# Altium PCB m11tcp.PcbDoc
Units mil, origin at the board's own origin, x right, y up, seen from the top; angles counter-clockwise.
Board outline 2000 x 2600 mil, 2 copper layers (Top Layer, Bottom Layer); 26 components, 56 nets, 128 pads, 16 vias.
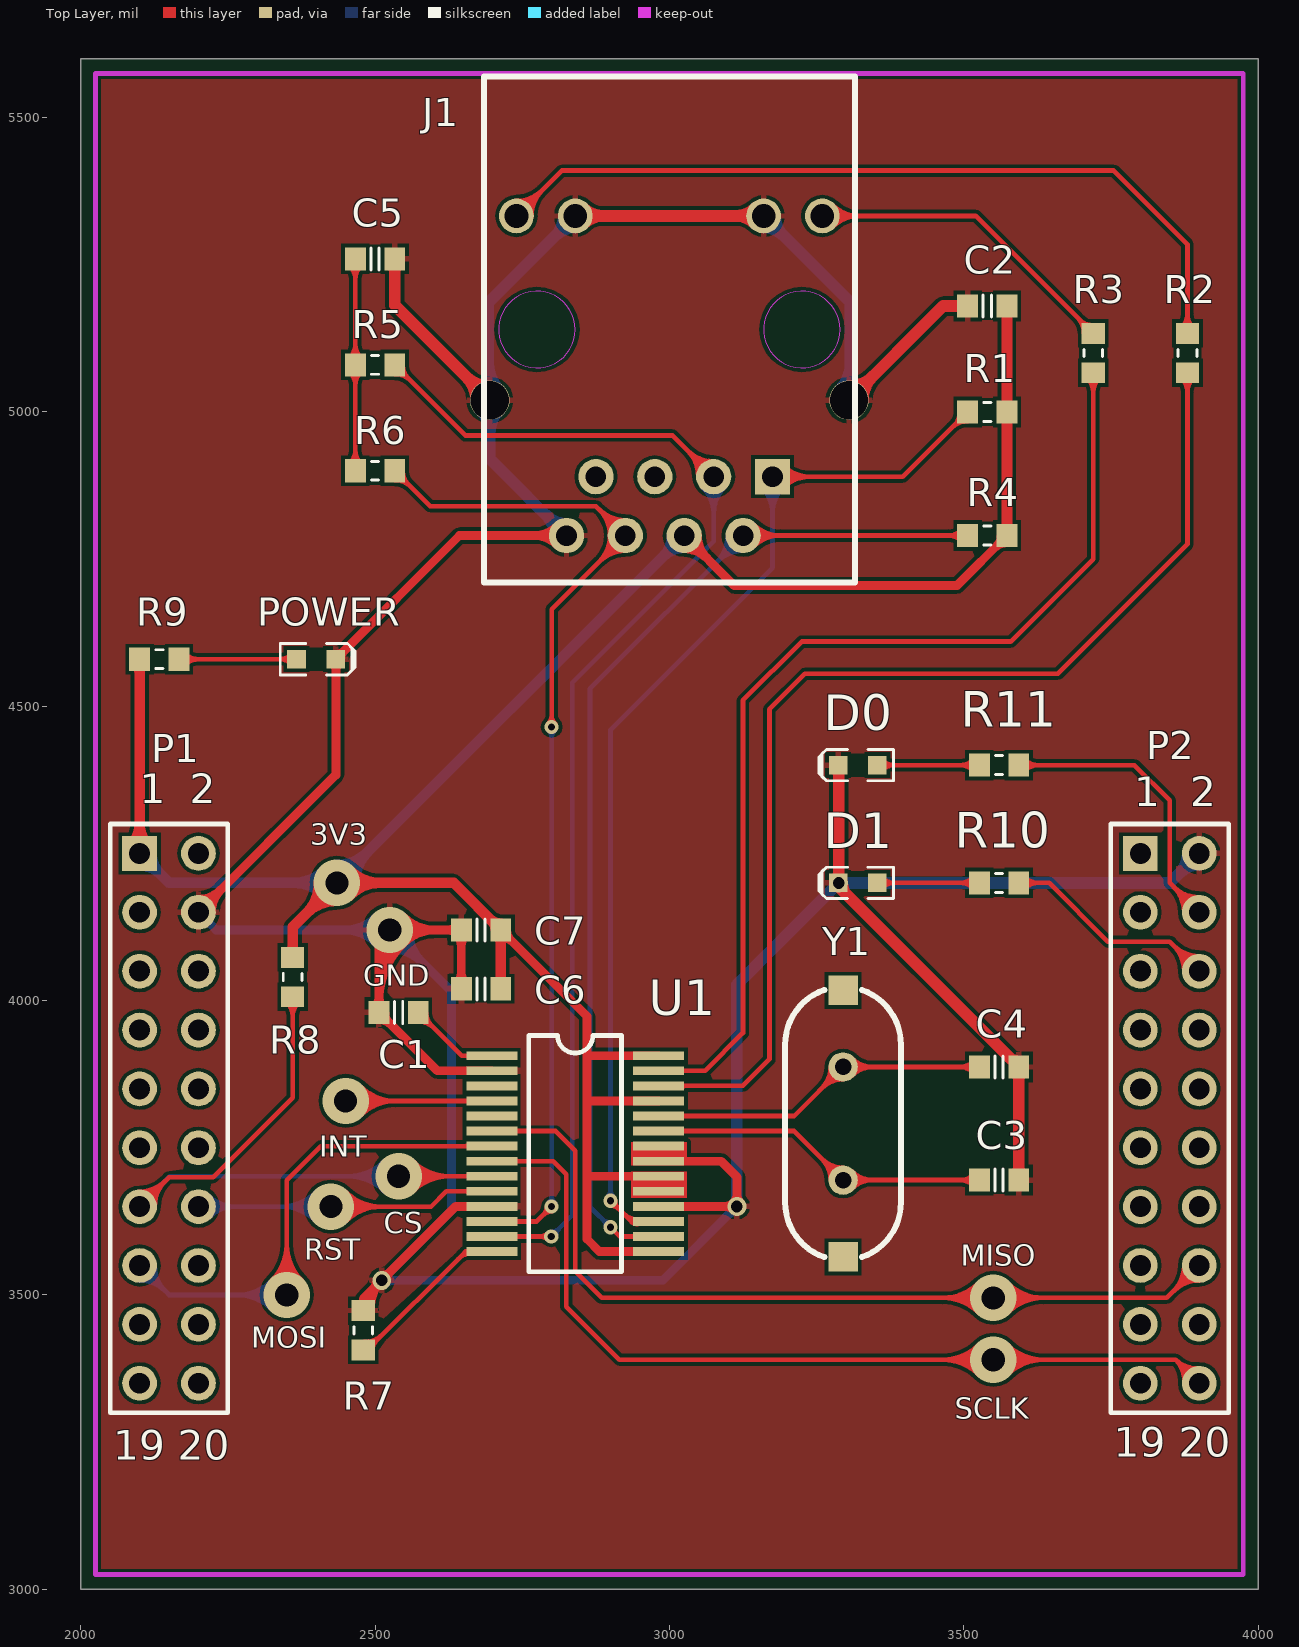
[diagram p0: Top Layer view]
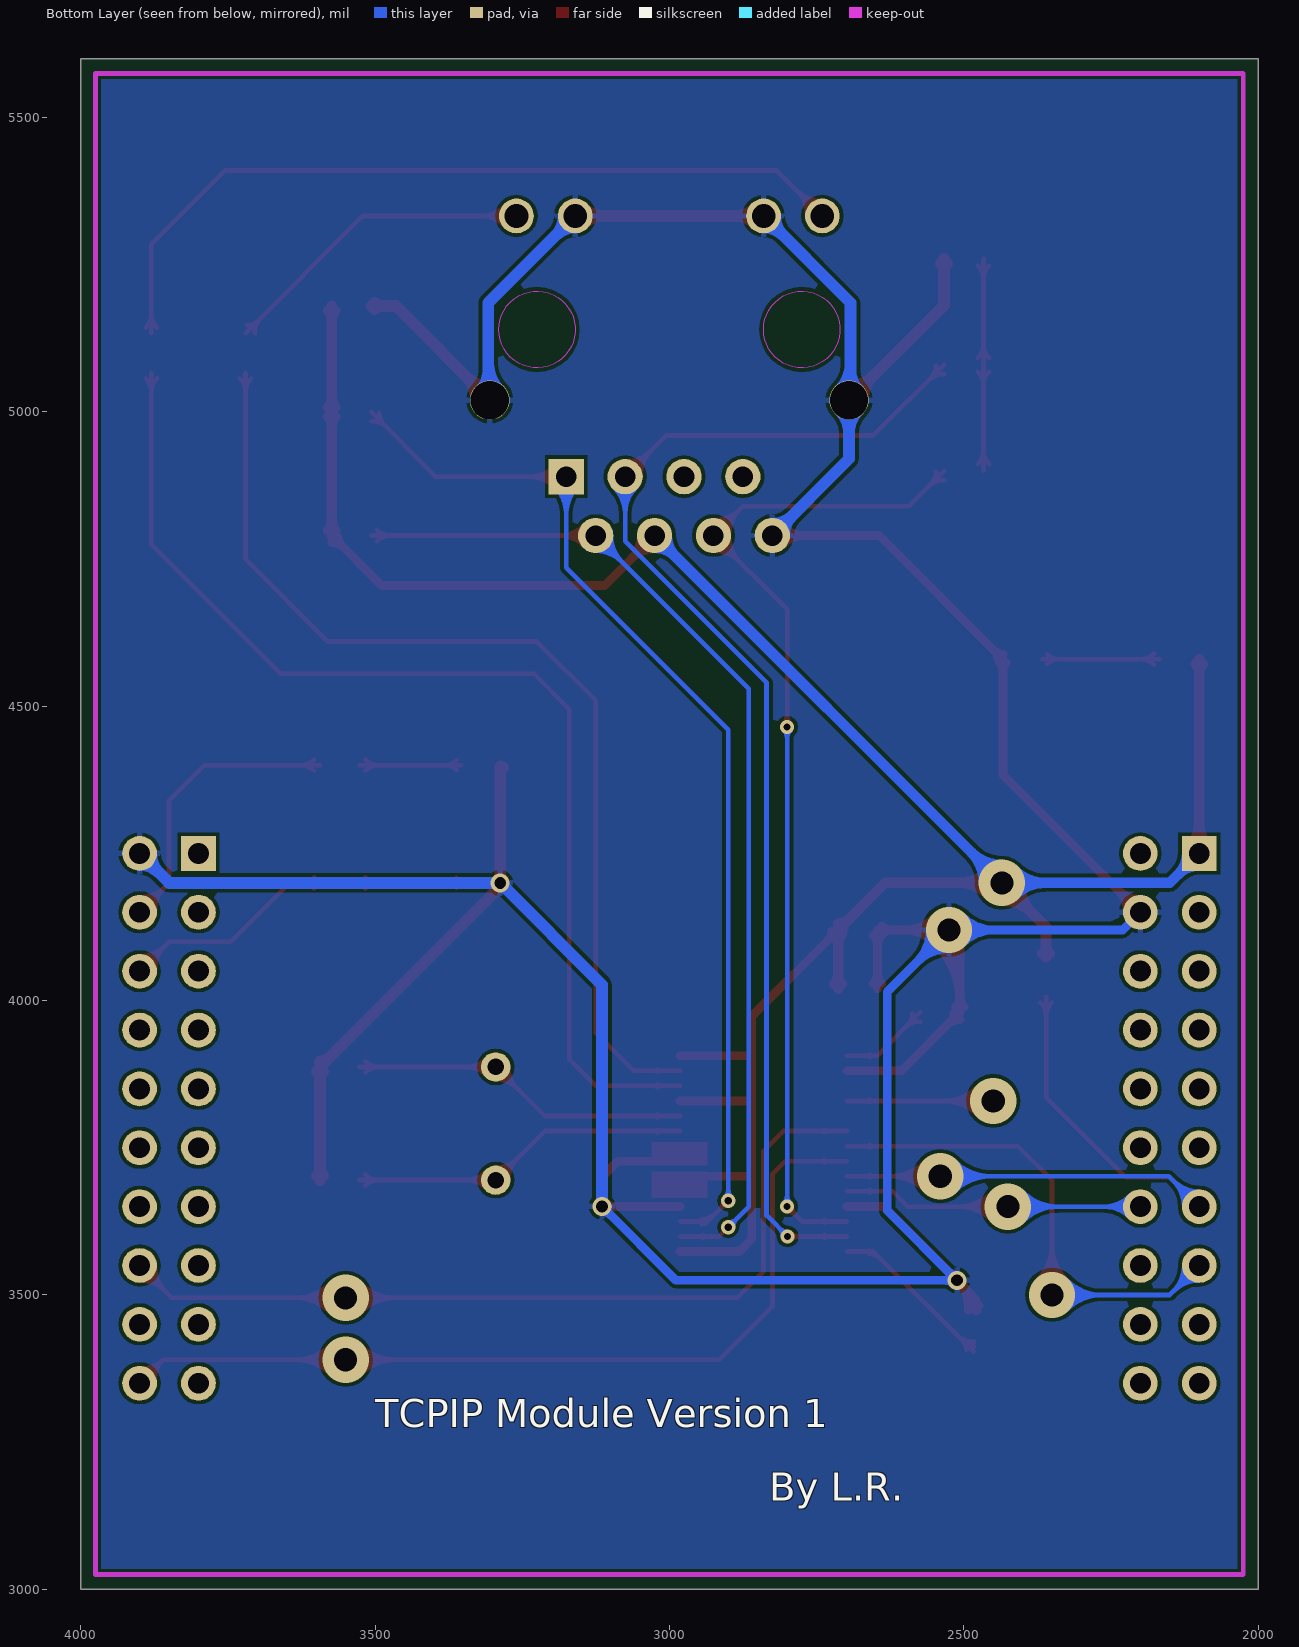
[diagram p1: Bottom Layer view, seen from below]
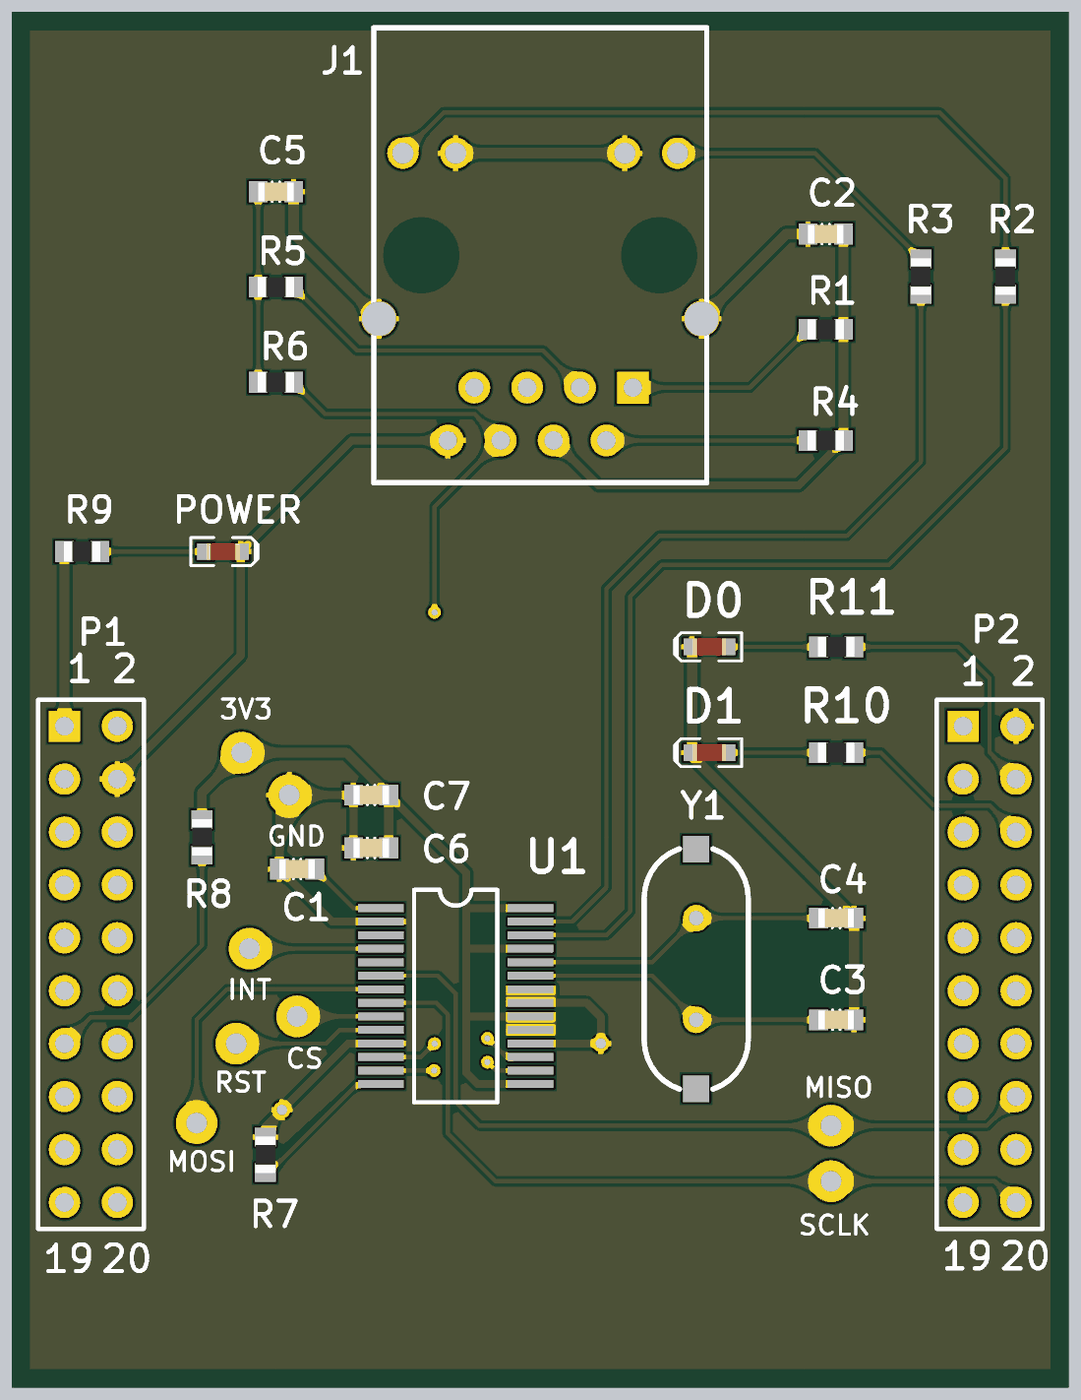
[diagram p2: 3D render of the assembled board from above, using the file's embedded part models]

## Layer stack, top to bottom
Top Layer: signal copper 1.4
Dielectric: dielectric 12.6, FR-4, Dk 4.8
Bottom Layer: signal copper 1.4

## Board outline
2000,3000 4000,3000 4000,5600 2000,5600

## Design rules (kind name [scope] priority, off if disabled: settings)
Clearance [All] p1: gap=6
PolygonConnect [All] p1: connectstyle=Relief reliefconductorwidth=10 reliefentries=4 polygonreliefangle="90 Angle"
RoutingVias VSS [InNet('GND')] p1: holewidth=20 width=32 viastyle="Through Hole" minholewidth=20 minwidth=32 maxholewidth=40 maxwidth=80
RoutingVias 3V3 [InNet('VCC3.3')] p2: holewidth=18 width=30 viastyle="Through Hole" minholewidth=18 minwidth=30 maxholewidth=40 maxwidth=80
RoutingVias RoutingVias_1 [All] p3: holewidth=12 width=24 viastyle="Through Hole" minholewidth=12 minwidth=24 maxholewidth=40 maxwidth=80
SilkscreenOverComponentPads [All] p1: minsilkscreentomaskgap=10
SolderMaskExpansion [All] p1: expansion=4
Width GND [InNet('GND')] p1: maxlimit=20 minlimit=8 preferedwidth=20
Width VCC [InNet('VCC3.3')] p2: maxlimit=18 minlimit=8 preferedwidth=18
Width Width_1 [All] p3: maxlimit=8 minlimit=8 preferedwidth=8
27 further rules are at their usual default settings.

## Components (designator, comment, footprint, x,y, rotation, side; value= is the part's Value field where it differs from the comment)
C1 "Cap Semi" CAP_0603 2540,3980 r0 top
C2 "Cap Semi" CAP_0603 3540,5180 r0 top
C3 "Cap Semi" CAP_0603 3560,3695.12 r180 top
C4 "Cap Semi" CAP_0603 3560,3887.24 r180 top
C5 "Cap Semi" CAP_0603 2500,5260 r180 top
C6 "Cap Semi" CAP_0603 2680,4020 r0 top
C7 "Cap Semi" CAP_0603 2680,4120 r0 top
D0 "LED2" LED_0603_RED 3320,4400 r180 top
D1 "LED2" LED_0603_RED 3320,4200 r180 top
J1 "RJ45" HR911105A 3000,5140 r0 top
P1 "Header 10X2" HDR2X10 2100,4250 r270 top
P2 "Header 10X2" HDR2X10 3800,4250 r270 top
POWER "LED2" LED_0603_RED 2400,4580 r0 top
R1 "Res Semi" RES_0603 3540,5000 r180 top
R2 "Res Semi" RES_0603 3880,5100 r270 top
R3 "Res Semi" RES_0603 3720,5100 r270 top
R4 "Res Semi" RES_0603 3540,4790 r180 top
R5 "Res Semi" RES_0603 2500,5080 r0 top
R6 "Res Semi" RES_0603 2500,4900 r0 top
R7 "Res Semi" RES_0603 2480,3440 r270 top
R8 "Res Semi" RES_0603 2360,4040 r90 top
R9 "Res Semi" RES_0603 2133.47,4580 r0 top
R10 "Res Semi" RES_0603 3560,4200 r180 top
R11 "Res Semi" RES_0603 3560,4400 r180 top
U1 "ENC28J60" SSOP28 2840,3740 r0 top
Y1 "25MHz" XTAL_US 3295,3695.12 r90 top

## Footprints (in the part's own frame and the unit in brackets; to place one, negate y for a bottom-side part, rotate by r counter-clockwise, add the part's x,y. Pads: shape width x height; smd on the part's side, far side on the other; paste and mask are expansions set on the pad)
CAP_0603 [mm]
  rect 0.9x1 smd: 1(-0.85,0) 2(0.85,0)
  Top Layer pour cut-out: -0.4,0.6 0.4,0.6 0.4,-0.6 -0.4,-0.6
  silkscreen extent -0.18,-0.48 0.18,0.48, body extent -0.85,-0.45 0.85,0.45, height 0.89
HDR2X10 [mm] "Connector; Header; 10x2 Position"
  rect 1.5x1.5 hole 0.9: 1(0,0)
  round 1.5 hole 0.9: 2(0,2.54) 3(2.54,0) 4(2.54,2.54) 5(5.08,0) 6(5.08,2.54) 7(7.62,0) 8(7.62,2.54) 9(10.16,0) 10(10.16,2.54) 11(12.7,0) 12(12.7,2.54) 13(15.24,0) 14(15.24,2.54) 15(17.78,0) 16(17.78,2.54) 17(20.32,0) 18(20.32,2.54) 19(22.86,0) 20(22.86,2.54)
  silkscreen extent -1.27,-1.27 24.13,3.81
HR911105A [mm]
  rect 1.524x1.524 hole 0.889: 1(4.45,-6.35)
  round 1.524 hole 0.889: 2(3.18,-8.89) 3(1.91,-6.35) 4(0.64,-8.89) 5(-0.63,-6.35) 6(-1.9,-8.89) 7(-3.17,-6.35) 8(-4.44,-8.89)
  round 1.5 hole 1.02: 9(6.6,4.9) 10(4.064,4.9) 11(-4.064,4.9) 12(-6.6,4.9)
  round 1.7 hole 1.65: 13(7.75,-3.048) 14(-7.75,-3.048)
  Keep-Out Layer circle w0.051: c-5.714,0 r1.65
  Keep-Out Layer circle w0.051: c5.716,0 r1.65
  silkscreen extent -8,-10.92 8,10.92
LED_0603_RED [mm]
  rect 0.8x0.8 smd: 1(-0.85,0) 2(0.85,0)
  Top Layer pour cut-out: -0.5,0.5 0.5,0.5 0.5,-0.5 -0.5,-0.5
  silkscreen extent -1.55,-0.68 1.68,0.67, body extent -0.8,-0.4 0.8,0.4, height 0.75
RES_0603 [mm]
  rect 0.9x1 smd: 1(-0.85,0) 2(0.85,0)
  Top Layer pour cut-out: -0.4,0.6 0.4,0.6 0.4,-0.6 -0.4,-0.6
  silkscreen extent -0.15,-0.41 0.15,0.41, body extent -0.87,-0.47 0.88,0.48, height 0.54
SSOP28 [mm]
  rect 2.2x0.38 smd: 1(-3.6,4.225) 2(-3.6,3.575) 3(-3.6,2.925) 4(-3.6,2.275) 5(-3.6,1.625) 6(-3.6,0.975) 7(-3.6,0.325) 8(-3.6,-0.325) 9(-3.6,-0.975) 10(-3.6,-1.625) 11(-3.6,-2.275) 12(-3.6,-2.925) 13(-3.6,-3.575) 14(-3.6,-4.225) 15(3.6,-4.225) 16(3.6,-3.575) 17(3.6,-2.925) 18(3.6,-2.275) 19(3.6,-1.625) 20(3.6,-0.975) 21(3.6,-0.325) 22(3.6,0.325) 23(3.6,0.975) 24(3.6,1.625) 25(3.6,2.275) 26(3.6,2.925) 27(3.6,3.575) 28(3.6,4.225)
  silkscreen extent -2,-5.1 2,5.1
XTAL_US [mil]
  round 50 hole 28: 1(0,0) 2(192.13,0)
  rect 50x50 smd: ""(-130.32,0) ""(322.44,0)
  silkscreen extent -131,-98 323,98

## Part data
C1 C2 C3 C4 C5 C6 C7: "Capacitor (Semiconductor SIM Model)"
D0 D1 POWER: "Typical RED, GREEN, YELLOW, AMBER GaAs LED"
J1: library part HR911105
P1 P2: "Header, 10-Pin, Dual row"
R1 R2 R3 R4 R5 R6 R7 R8 R9 R10 R11: "Semiconductor Resistor"
Y1: library part XTAL, "Crystal Oscillator"

## Via types
v1: diameter 78.74, hole 39.37, Top Layer to Bottom Layer, 8 vias
v2: diameter 24, hole 12, Top Layer to Bottom Layer, 5 vias
v3: diameter 32, hole 20, Top Layer to Bottom Layer, 3 vias

## Nets (pads, with @x,y where several pads share a name; then routed paths per layer and width w, separated by ;. In a path a pad name is that pad's centre, name@x,y a point inside that pad or via, vN(x,y) a via of type N, cw(c..) or ccw(c..) an arc to the next point about the centre after c; other vN are vias at no path point)
GND: C1.1 C2.1 C3.1 C4.1 C5.1 C6.1 C7.1 D0.2 D1.2 J1.8 J1.10 J1.11 J1.13 J1.14 P1.4 P2.2 POWER.2 R7.1 U1.2 U1.11 U1.18 U1.21 U1.22 | length 10568.1
  Top Layer w15: P1.4 2433.46,4383.46 POWER.2 2643.47,4790 J1.8 ; P1.4@2200,4172.03 ccw(c2200,4225.21) 2237.6,4187.6 ccw(c2275.21,4150) P1.4@2222.03,4150 ; POWER.2@2427.63,4574.17 cw(c2413.55,4560.09) 2433.46,4560.09 cw(c2453.38,4560.09) POWER.2@2439.3,4574.17 ; POWER.2@2433.46,4588.25 ccw(c2433.46,4608.16) 2447.54,4594.08 ccw(c2461.63,4580) POWER.2@2441.71,4580 ; R7.1@2474.01,3481.74 ccw(c2465.53,3493.46) 2480,3493.46 ; R7.1@2477.2,3473.17 cw(c2513.67,3475.45) 2487.83,3501.29 ; R7.1 2480,3493.47 ; R7.1@2485.99,3481.74 cw(c2494.47,3493.46) 2480,3493.46 ; R7.1@2492.17,3474.1 cw(c2557.9,3478.22) v3(2511.33,3524.8) ; C1.1@2499.31,3989.19 ccw(c2481.87,4006.63) 2506.53,4006.63 ccw(c2531.2,4006.63) C1.1@2513.76,3989.19 ; v3@2502.83,3524.8 cw(c2482.31,3524.8) 2496.82,3510.29 cw(c2511.33,3495.77) v3@2511.33,3516.3 ; C1.1@2506.53,3967.82 cw(c2506.53,3938.4) 2527.34,3959.2 ; C1.1@2506.53,3998.48 cw(c2646.52,3998.48) 2547.54,4097.46 cw(c2601.94,4043.06) 2601.94,4120 cw(c2601.94,4196.94) v1@2547.54,4142.54 ; 2506.53,4034.69 cw(c2610.31,4034.69) 2536.93,4108.07 cw(c2565.73,4079.27) 2565.73,4120 cw(c2565.73,4160.73) v1@2536.93,4131.93 ; 2506.53,4070.91 cw(c2574.09,4070.91) v1@2526.32,4118.68 ; v1@2506.53,4101.53 C1.1 2605.79,3880.75 U1.2 ; v3@2511.33,3533.3 ccw(c2511.33,3553.82) 2525.84,3539.31 ccw(c2540.35,3524.8) v3@2519.83,3524.8 ; C1.1@2516.75,3978.03 ccw(c2536.66,3978.03) C1.1@2522.58,3963.95 ; v1(2525,4120) C7.1 C6.1 ; C6.1@2639.31,4029.19 ccw(c2621.87,4046.63) 2646.53,4046.63 ccw(c2671.2,4046.63) C6.1@2653.76,4029.19 ; C7.1@2639.31,4110.81 cw(c2621.87,4093.37) 2646.53,4093.37 cw(c2671.2,4093.37) C7.1@2653.76,4110.81 ; C7.1@2639.31,4112.78 ccw(c2621.87,4095.34) 2621.87,4120 ccw(c2621.87,4144.67) C7.1@2639.31,4127.22 ; U1.11 2636.97,3650.43 v3(2511.33,3524.8) ; J1.8@2809.29,4774.09 ccw(c2770.88,4735.68) 2770.88,4790 ccw(c2770.88,4844.32) J1.8@2809.29,4805.91 ; U1.18 v3(3114.57,3650.43) ; U1.21 3087.8,3727.2 3115,3700 v3@3115,3650.43 ; v3@3108.56,3644.42 ccw(c3094.05,3629.91) 3094.05,3650.43 ccw(c3094.05,3670.95) 3108.56,3656.44 ccw(c3093,3672) 3115,3672 ; 3115,3669.91 ccw(c3134.04,3669.91) v3@3120.58,3656.44 ; 2480,3493.47 v3(2511.33,3524.8)
  Top Layer w20: C5.1@2528.01,5252.57 cw(c2514.84,5239.4) 2533.47,5239.4 cw(c2552.09,5239.4) C5.1@2538.92,5252.57 ; C5.1 2533.47,5181.42 J1.14 ; J1.14@2671.42,5020 ccw(c2614.77,5020) 2654.83,5060.06 ccw(c2694.88,5100.11) J1.14@2694.88,5043.46 ; J1.11 J1.10 ; J1.11@2853.81,5319.1 cw(c2887.14,5285.77) 2887.14,5332.91 cw(c2887.14,5380.06) J1.11@2853.81,5346.72 ; J1.10@3146.19,5319.1 ccw(c3112.86,5285.77) 3112.86,5332.91 ccw(c3112.86,5380.06) J1.10@3146.19,5346.72 ; D1.2@3282.47,4204.07 ccw(c3270.24,4216.29) 3287.53,4216.29 ; D0.2@3282.47,4395.94 cw(c3270.24,4383.71) 3287.53,4383.71 ; D1.2 3286.54,4194.17 C4.1 C3.1 ; v3(3287.53,4200) D0.2@3287.53,4397.53 ; D1.2@3292.28,4200 ccw(c3320.23,4200) 3300.47,4180.24 ; D1.2@3293.53,4200 ccw(c3324.5,4200) 3302.61,4178.1 ; J1.13 3465.12,5180 C2.1 ; J1.13@3305.12,5043.46 ccw(c3305.12,5100.11) 3345.17,5060.06 ccw(c3385.23,5020) J1.13@3328.58,5020 ; C2.1@3501.08,5174.54 ccw(c3487.91,5161.37) 3487.91,5180 ccw(c3487.91,5198.63) C2.1@3501.08,5185.46 ; C4.1@3576.93,3903.78 ccw(c3593.47,3920.31) C4.1@3593.47,3896.93 ; C3.1@3588.01,3702.54 ccw(c3574.84,3715.72) 3593.47,3715.72 ccw(c3612.09,3715.72) C3.1@3598.92,3702.54 ; C4.1@3588.01,3879.82 cw(c3574.84,3866.65) 3593.47,3866.65 cw(c3612.09,3866.65) C4.1@3598.92,3879.82
  Bottom Layer w15: P1.4 2230,4120 v1(2525,4120) 2630,4015 2630,3643.47 2511.53,3525 2989.13,3525 v3(3114.57,3650.43) ; v1@2502.46,4097.46 ccw(c2448.06,4043.06) 2448.06,4120 ccw(c2448.06,4196.94) v1@2502.46,4142.54 ; v3@2511.33,3533.3 ccw(c2511.33,3553.81) 2525.84,3539.3 ccw(c2540.36,3524.8) v3@2519.83,3524.8 ; v1@2513.07,4108.07 ccw(c2484.27,4079.27) 2484.27,4120 ccw(c2484.27,4160.73) v1@2513.07,4131.93 ; v3@2517.34,3518.79 cw(c2532.35,3503.78) 2532.35,3525 ; v3@2517.34,3530.81 ccw(c2531.36,3544.82) 2531.36,3525 ; v1@2525,4088.13 cw(c2525,4011.19) 2579.41,4065.59 cw(c2633.81,4120) v1@2556.87,4120 ; v1@2525,4103.13 cw(c2525,4062.4) 2553.8,4091.2 cw(c2582.6,4120) v1@2541.87,4120 ; v3@3106.07,3650.43 cw(c3085.55,3650.43) 3100.06,3635.92 cw(c3114.57,3621.41) v3@3114.57,3641.93
  Bottom Layer w20: J1.14@2678.29,5003.41 cw(c2638.23,4963.35) 2694.88,4963.35 cw(c2751.53,4963.35) J1.14@2711.47,5003.41 ; J1.14@2678.29,5036.59 ccw(c2644.29,5070.59) 2692.37,5070.59 ; 2692.37,5082.71 ccw(c2757.59,5082.71) J1.14@2711.47,5036.59 ; J1.8@2805.2,4790 ccw(c2756.91,4790) 2791.05,4824.14 ccw(c2825.2,4858.28) J1.8@2825.2,4810 ; J1.11@2820.47,5332.91 cw(c2773.33,5332.91) 2806.66,5299.58 cw(c2840,5266.24) J1.11@2840,5313.39 ; J1.8 2694.88,4920.31 J1.14 2692.37,5022.51 2692.37,5185.28 J1.11 ; v3(3114.57,3650.43) 3114.57,4025 3114.57,4027.03 v3(3287.53,4200) 3850,4200 P2.2 ; J1.10@3160,5313.39 cw(c3160,5266.24) 3193.34,5299.58 cw(c3226.67,5332.91) J1.10@3179.53,5332.91 ; J1.10 3307.71,5185.21 3307.71,5022.59 J1.13 ; J1.13@3288.53,5036.59 ccw(c3242.22,5082.9) 3307.71,5082.9 ; 3307.71,5070.4 ccw(c3355.52,5070.4) J1.13@3321.71,5036.59 ; P2.2@3880.47,4250 cw(c3833.33,4250) 3866.66,4216.66 cw(c3900,4183.33) P2.2@3900,4230.47
LED0: P2.4 R11.1 | length 707.4
  Top Layer w8: R11.1 3790,4400 3850,4340 3850,4200 P2.4 ; R11.1@3603.16,4390.3 cw(c3626.58,4366.88) 3626.58,4400 cw(c3626.58,4433.11) R11.1@3603.16,4409.7 ; P2.4@3874.47,4150 ccw(c3812.84,4150) 3856.42,4193.58 ccw(c3900,4237.16) P2.4@3900,4175.53 ; P2.4@3882.47,4150 ccw(c3840.16,4150) 3870.08,4179.92 ccw(c3900,4209.84) P2.4@3900,4167.53
LED1: P2.6 R10.1 | length 584
  Top Layer w8: R10.1 3645,4200 3745,4100 3850,4100 P2.6 ; R10.1@3603.16,4190.3 cw(c3626.58,4166.88) 3626.58,4200 cw(c3626.58,4233.11) R10.1@3603.16,4209.7 ; P2.6@3874.47,4050 ccw(c3812.84,4050) 3856.42,4093.58 ccw(c3900,4137.16) P2.6@3900,4075.53 ; P2.6@3882.47,4050 ccw(c3840.16,4050) 3870.08,4079.92 ccw(c3900,4109.84) P2.6@3900,4067.53
LEDA: R3.2 U1.27 | length 1811
  Top Layer w8: U1.27 3060.75,3880.75 3125,3945 3125,4510 3225,4610 3580,4610 3720,4750 R3.2 ; U1.27@3020.02,3878.29 cw(c3025.96,3872.35) 3025.96,3880.75 cw(c3025.96,3889.15) U1.27@3020.02,3883.21 ; R3.2@3710.3,5056.84 cw(c3686.89,5033.42) 3720,5033.42 cw(c3753.12,5033.42) R3.2@3729.7,5056.84
LEDB: R2.2 U1.26 | length 1984.5
  Top Layer w8: U1.26 3125,3855.16 3170,3900.16 3170,4495 3230,4555 3660,4555 3880,4775 R2.2 ; U1.26@3020.02,3852.7 cw(c3025.96,3846.76) 3025.96,3855.16 cw(c3025.96,3863.56) U1.26@3020.02,3857.62 ; R2.2@3870.3,5056.84 cw(c3846.89,5033.42) 3880,5033.42 cw(c3913.12,5033.42) R2.2@3889.7,5056.84
NET_CS: P1.13 R8.1 U1.9 | length 2142.3
  Top Layer w8: P1.13 2150,3700 2225,3700 2360,3835 R8.1 ; P1.13@2100,3667.53 ccw(c2100,3709.84) 2129.92,3679.92 ccw(c2159.84,3650) P1.13@2117.53,3650 ; P1.13@2100,3675.53 ccw(c2100,3737.16) 2143.58,3693.58 ccw(c2187.16,3650) P1.13@2125.53,3650 ; R8.1@2350.3,3996.84 cw(c2326.88,3973.42) 2360,3973.42 cw(c2393.11,3973.42) R8.1@2369.7,3996.84 ; v1(2540,3701.61) U1.9 ; v1@2553.7,3687.92 cw(c2586.76,3654.85) 2586.76,3701.61 cw(c2586.76,3748.38) v1@2553.7,3715.31 ; v1@2559.35,3682.26 cw(c2606.08,3635.54) 2606.08,3701.61 cw(c2606.08,3767.69) v1@2559.35,3720.97 ; v1@2565.01,3676.6 cw(c2625.39,3616.22) 2625.39,3701.61 cw(c2625.39,3787.01) v1@2565.01,3726.62 ; U1.9@2659.98,3699.15 ccw(c2654.04,3693.21) 2654.04,3701.61 ccw(c2654.04,3710.02) U1.9@2659.98,3704.08
  Bottom Layer w8: P1.13 2151.61,3701.61 v1(2540,3701.61) ; P1.13@2100,3667.53 ccw(c2100,3709.84) 2129.92,3679.92 ccw(c2159.84,3650) P1.13@2117.53,3650 ; P1.13@2100,3675.53 ccw(c2100,3737.16) 2143.58,3693.58 ccw(c2187.16,3650) P1.13@2125.53,3650 ; v1@2514.99,3676.6 ccw(c2454.61,3616.22) 2454.61,3701.61 ccw(c2454.61,3787.01) v1@2514.99,3726.62 ; v1@2520.65,3682.26 ccw(c2473.92,3635.54) 2473.92,3701.61 ccw(c2473.92,3767.69) v1@2520.65,3720.97 ; v1@2526.3,3687.92 ccw(c2493.24,3654.85) 2493.24,3701.61 ccw(c2493.24,3748.38) v1@2526.3,3715.31
NET_INT: U1.4 | length 572.8
  Top Layer w8: v1(2450,3829.57) U1.4 ; v1@2463.7,3815.87 cw(c2496.76,3782.8) 2496.76,3829.57 cw(c2496.76,3876.33) v1@2463.7,3843.26 ; v1@2469.35,3810.21 cw(c2516.08,3763.49) 2516.08,3829.57 cw(c2516.08,3895.64) v1@2469.35,3848.92 ; v1@2475.01,3804.56 cw(c2535.39,3744.18) 2535.39,3829.57 cw(c2535.39,3914.96) v1@2475.01,3854.58 ; U1.4@2659.98,3827.11 ccw(c2654.04,3821.16) 2654.04,3829.57 ccw(c2654.04,3837.97) U1.4@2659.98,3832.03
NET_MISO: P2.16 U1.6 | length 2261.2
  Top Layer w8: U1.6 2806.61,3778.39 2840,3745 2840,3540 2885,3495 3845,3495 P2.16 ; U1.6@2736.56,3775.92 cw(c2742.5,3769.98) 2742.5,3778.39 cw(c2742.5,3786.79) U1.6@2736.56,3780.85 ; v1@3524.99,3469.99 ccw(c3464.61,3409.61) 3464.61,3495 ccw(c3464.61,3580.39) v1@3524.99,3520.01 ; v1@3530.65,3475.65 ccw(c3483.92,3428.92) 3483.92,3495 ccw(c3483.92,3561.08) v1@3530.65,3514.35 ; v1@3536.3,3481.3 ccw(c3503.24,3448.24) 3503.24,3495 ccw(c3503.24,3541.76) v1@3536.3,3508.7 ; v1@3563.7,3481.3 cw(c3596.76,3448.24) 3596.76,3495 cw(c3596.76,3541.76) v1@3563.7,3508.7 ; v1@3569.35,3475.65 cw(c3616.08,3428.92) 3616.08,3495 cw(c3616.08,3561.08) v1@3569.35,3514.35 ; v1@3575.01,3469.99 cw(c3635.39,3409.61) 3635.39,3495 cw(c3635.39,3580.39) v1@3575.01,3520.01 ; P2.16@3874.47,3550 cw(c3812.84,3550) 3856.42,3506.42 cw(c3900,3462.84) P2.16@3900,3524.47 ; P2.16@3882.47,3550 cw(c3840.16,3550) 3870.08,3520.08 cw(c3900,3490.16) P2.16@3900,3532.47
  other v1: 3550,3495
NET_MOSI: P1.15 U1.7 | length 1637.2
  Top Layer w8: v1@2324.99,3525.01 ccw(c2264.61,3585.39) 2350,3585.39 ccw(c2435.39,3585.39) v1@2375.01,3525.01 ; v1@2330.65,3519.35 ccw(c2283.92,3566.08) 2350,3566.08 ccw(c2416.08,3566.08) v1@2369.35,3519.35 ; v1@2336.3,3513.7 ccw(c2303.24,3546.76) 2350,3546.76 ccw(c2396.76,3546.76) v1@2363.7,3513.7 ; v1(2350,3500) 2350,3695 2407.8,3752.8 U1.7 ; U1.7@2659.98,3750.33 ccw(c2654.04,3744.39) 2654.04,3752.8 ccw(c2654.04,3761.2) U1.7@2659.98,3755.26
  Bottom Layer w8: P1.15@2100,3524.47 cw(c2100,3462.84) 2143.58,3506.42 cw(c2187.16,3550) P1.15@2125.53,3550 ; P1.15@2100,3532.47 cw(c2100,3490.16) 2129.92,3520.08 cw(c2159.84,3550) P1.15@2117.53,3550 ; P1.15 2150,3500 v1(2350,3500) ; v1@2324.99,3474.99 ccw(c2264.61,3414.61) 2264.61,3500 ccw(c2264.61,3585.39) v1@2324.99,3525.01 ; v1@2330.65,3480.65 ccw(c2283.92,3433.92) 2283.92,3500 ccw(c2283.92,3566.08) v1@2330.65,3519.35 ; v1@2336.3,3486.3 ccw(c2303.24,3453.24) 2303.24,3500 ccw(c2303.24,3546.76) v1@2336.3,3513.7
NET_RST: P1.14 U1.10 | length 1308.3
  Top Layer w8: v1(2425,3650) 2595,3650 2621.02,3676.02 U1.10 ; v1@2438.7,3636.3 cw(c2471.76,3603.24) 2471.76,3650 cw(c2471.76,3696.76) v1@2438.7,3663.7 ; v1@2444.35,3630.65 cw(c2491.08,3583.92) 2491.08,3650 cw(c2491.08,3716.08) v1@2444.35,3669.35 ; v1@2450.01,3624.99 cw(c2510.39,3564.61) 2510.39,3650 cw(c2510.39,3735.39) v1@2450.01,3675.01 ; U1.10@2659.98,3673.56 ccw(c2654.04,3667.62) 2654.04,3676.02 ccw(c2654.04,3684.43) U1.10@2659.98,3678.48
  Bottom Layer w8: P1.14 v1(2425,3650) ; P1.14@2212.39,3637.61 cw(c2242.32,3607.68) 2242.32,3650 cw(c2242.32,3692.32) P1.14@2212.39,3662.39 ; P1.14@2218.05,3631.95 cw(c2261.63,3588.37) 2261.63,3650 cw(c2261.63,3711.63) P1.14@2218.05,3668.05 ; v1@2399.99,3624.99 ccw(c2339.61,3564.61) 2339.61,3650 ccw(c2339.61,3735.39) v1@2399.99,3675.01 ; v1@2405.65,3630.65 ccw(c2358.92,3583.92) 2358.92,3650 ccw(c2358.92,3716.08) v1@2405.65,3669.35 ; v1@2411.3,3636.3 ccw(c2378.24,3603.24) 2378.24,3650 ccw(c2378.24,3696.76) v1@2411.3,3663.7
NET_SCK: P2.20 U1.8 | length 2268.5
  Top Layer w8: U1.8 2802.8,3727.2 2825,3705 2825,3480 2915,3390 3860,3390 ; U1.8@2736.56,3724.74 cw(c2742.5,3718.8) 2742.5,3727.2 cw(c2742.5,3735.61) U1.8@2736.56,3729.67 ; v1@3524.99,3364.99 ccw(c3464.61,3304.61) 3464.61,3390 ccw(c3464.61,3475.39) v1@3524.99,3415.01 ; v1@3530.65,3370.65 ccw(c3483.92,3323.92) 3483.92,3390 ccw(c3483.92,3456.08) v1@3530.65,3409.35 ; v1@3536.3,3376.3 ccw(c3503.24,3343.24) 3503.24,3390 ccw(c3503.24,3436.76) v1@3536.3,3403.7 ; v1@3563.7,3376.3 cw(c3596.76,3343.24) 3596.76,3390 cw(c3596.76,3436.76) v1@3563.7,3403.7 ; v1@3569.35,3370.65 cw(c3616.08,3323.92) 3616.08,3390 cw(c3616.08,3456.08) v1@3569.35,3409.35 ; v1@3575.01,3364.99 cw(c3635.39,3304.61) 3635.39,3390 cw(c3635.39,3475.39) v1@3575.01,3415.01 ; P2.20@3874.52,3351.59 ccw(c3824.71,3354.71) 3860,3390 ; P2.20@3882.51,3351.09 ccw(c3848.31,3353.23) 3872.54,3377.46 ccw(c3896.77,3401.69) P2.20@3898.91,3367.49 ; P2.20@3898.41,3375.48 cw(c3895.29,3425.29) 3860,3390 ; P2.20 3860,3390
  other v1: 3550,3390
NetC1_2: C1.2 U1.1 | length 220.5
  Top Layer w8: C1.2@2573.46,3964.32 cw(c2573.46,3926.45) 2600.24,3953.22 ; C1.2 2647.13,3906.34 U1.1 ; C1.2@2587.18,3978.03 ccw(c2615.54,3978.03) 2595.49,3957.98 ; U1.1@2659.98,3903.88 ccw(c2654.04,3897.94) 2654.04,3906.34 ccw(c2654.04,3914.74) U1.1@2659.98,3908.8
NetC3_2: C3.2 U1.23 Y1.1 | length 902.4
  Top Layer w8: U1.23 3211.73,3778.39 Y1.1 C3.2 ; U1.23@3020.02,3775.92 cw(c3025.96,3769.98) 3025.96,3778.39 cw(c3025.96,3786.79) U1.23@3020.02,3780.85 ; Y1.1@3274,3695.12 ccw(c3223.3,3695.12) 3259.15,3730.97 ccw(c3295,3766.82) Y1.1@3295,3716.12 ; Y1.1@3282,3695.12 ccw(c3250.62,3695.12) 3272.81,3717.31 ccw(c3295,3739.5) Y1.1@3295,3708.12 ; Y1.1@3304.19,3685.93 cw(c3326.38,3663.73) 3326.38,3695.12 cw(c3326.38,3726.5) Y1.1@3304.19,3704.31 ; Y1.1@3309.85,3680.27 cw(c3345.7,3644.42) 3345.7,3695.12 cw(c3345.7,3745.82) Y1.1@3309.85,3709.97 ; C3.2@3516.84,3685.42 ccw(c3493.42,3662) 3493.42,3695.12 ccw(c3493.42,3728.23) C3.2@3516.84,3704.82
NetC4_2: C4.2 U1.24 Y1.2 | length 907.1
  Top Layer w8: U1.24 3175,3803.98 ; U1.24@3020.02,3801.52 cw(c3025.96,3795.57) 3025.96,3803.98 cw(c3025.96,3812.38) U1.24@3020.02,3806.44 ; 3179.71,3803.98 3175,3803.98 ; Y1.2@3274,3887.24 cw(c3223.3,3887.24) 3259.15,3851.39 cw(c3295,3815.55) Y1.2@3295,3866.24 ; Y1.2@3282,3887.24 cw(c3250.62,3887.24) 3272.81,3865.05 cw(c3295,3842.86) Y1.2@3295,3874.24 ; Y1.2@3304.19,3878.05 cw(c3326.38,3855.86) 3326.38,3887.24 cw(c3326.38,3918.63) Y1.2@3304.19,3896.44 ; Y1.2@3309.85,3872.39 cw(c3345.7,3836.55) 3345.7,3887.24 cw(c3345.7,3937.94) Y1.2@3309.85,3902.09 ; C4.2@3516.84,3877.54 ccw(c3493.42,3854.13) 3493.42,3887.24 ccw(c3493.42,3920.36) C4.2@3516.84,3896.94 ; C4.2 Y1.2 3211.73,3803.98 3175,3803.98
NetC5_2: C5.2 R5.1 R6.1 | length 568.1
  Top Layer w8: R6.1@2456.84,4911.67 ccw(c2433.42,4935.08) 2466.54,4935.08 ccw(c2499.65,4935.08) R6.1@2476.23,4911.67 ; R5.1@2456.84,5068.33 cw(c2433.42,5044.92) 2466.53,5044.92 cw(c2499.65,5044.92) R5.1@2476.23,5068.33 ; R5.1@2456.84,5091.67 ccw(c2433.42,5115.08) 2466.53,5115.08 ccw(c2499.65,5115.08) R5.1@2476.23,5091.67 ; C5.2@2456.84,5248.33 cw(c2433.42,5224.92) 2466.54,5224.92 cw(c2499.65,5224.92) C5.2@2476.23,5248.33 ; R6.1 C5.2
NetD0_1: D0.1 R11.2 | length 269.6
  Top Layer w8: D0.1 R11.2 ; D0.1@3361.77,4391.69 cw(c3381.83,4371.64) 3381.83,4400 cw(c3381.83,4428.36) D0.1@3361.77,4408.31 ; 3493.42,4400 cw(c3493.42,4366.88) R11.2@3516.84,4390.3 ; 3493.43,4400 ccw(c3493.43,4433.11) R11.2@3516.84,4409.7
NetD1_1: D1.1 R10.2 | length 269.6
  Top Layer w8: D1.1 R10.2 ; D1.1@3361.77,4191.69 cw(c3381.83,4171.64) 3381.83,4200 cw(c3381.83,4228.36) D1.1@3361.77,4208.31 ; 3493.42,4200 cw(c3493.42,4166.88) R10.2@3516.84,4190.3 ; 3493.43,4200 ccw(c3493.43,4233.11) R10.2@3516.84,4209.7
NetJ1_9: J1.9 R3.1 | length 758.1
  Top Layer w8: J1.9 3520.55,5332.91 R3.1 ; J1.9@3272.24,5320.52 cw(c3302.16,5290.6) 3302.16,5332.91 cw(c3302.16,5375.23) J1.9@3272.24,5345.31 ; J1.9@3277.89,5314.86 cw(c3321.47,5271.28) 3321.47,5332.91 cw(c3321.47,5394.54) J1.9@3277.89,5350.96 ; 3693.22,5160.24 cw(c3666.45,5133.47) R3.1@3704.32,5133.47 ; 3697.98,5155.49 ccw(c3718.03,5175.54) R3.1@3718.03,5147.18
NetJ1_12: J1.12 R2.1 | length 1590.4
  Top Layer w8: J1.12 2817.24,5410 3755,5410 3880,5285 R2.1 ; J1.12@2740.16,5350.44 ccw(c2740.16,5392.76) 2770.08,5362.83 ccw(c2800,5332.91) J1.12@2757.69,5332.91 ; J1.12@2740.16,5358.44 ccw(c2740.16,5420.07) 2783.74,5376.49 ccw(c2827.31,5332.91) J1.12@2765.68,5332.91 ; R2.1@3870.3,5143.16 ccw(c3846.89,5166.58) 3880,5166.58 ccw(c3913.12,5166.58) R2.1@3889.7,5143.16
NetPOWER_1: POWER.1 R9.2 | length 296.2
  Top Layer w8: R9.2 POWER.1 ; R9.2@2176.63,4570.3 cw(c2200.04,4546.89) 2200.04,4580 cw(c2200.04,4613.11) R9.2@2176.63,4589.7 ; 2338.17,4580 cw(c2338.17,4551.63) POWER.1@2358.23,4571.69 ; 2338.18,4580 ccw(c2338.18,4608.36) POWER.1@2358.23,4588.31
NetR7_2: R7.2 U1.14 | length 405.9
  Top Layer w8: R7.2@2481.97,3412.25 ccw(c2481.97,3437.08) R7.2@2499.52,3419.52 ; R7.2@2481.97,3420.25 ccw(c2481.97,3464.39) 2513.18,3433.18 ; R7.2@2483.27,3403.27 2653.66,3573.66 U1.14 ; R7.2@2495.69,3406.54 cw(c2517.78,3406.54) 2502.16,3422.16 ; 2641.51,3561.51 cw(c2662.44,3540.58) U1.14@2662.44,3570.18 ; 2649.27,3569.27 cw(c2655.86,3562.68) U1.14@2660.65,3570.68 ; U1.14@2659.98,3571.2 ccw(c2654.04,3565.26) 2654.04,3573.66 ccw(c2654.04,3582.06) U1.14@2659.98,3576.12
PA3: P2.18
PA6: P1.17
PA7: P1.19
PB0: P1.5
PB1: P1.7
PB3: P2.5
PB5: P1.3
PB6: P2.14
PB7: P2.12
PC4: P2.7
PC5: P2.9
PC6: P2.11
PC7: P2.13
PD0: P1.6
PD1: P1.8
PD2: P1.10
PD3: P1.12
PD6: P2.15
PD7: P2.17
PE2: P1.16
PE3: P1.18
PE4: P1.9
PE5: P1.11
PF0: P2.8
PF1: P1.20
PF2: P2.1
PF3: P2.3
PF4: P2.19
RST: P2.10
TPIN+: J1.3 R5.2 U1.13 | length 2586.1
  Top Layer w8: R5.2@2533.46,5064.32 cw(c2533.46,5026.45) 2560.24,5053.22 ; R5.2 2653.47,4960 3005.2,4960 J1.3 ; R5.2@2547.18,5078.03 ccw(c2575.54,5078.03) 2555.49,5057.98 ; U1.13 v2(2799.25,3599.25) ; U1.13@2736.56,3596.79 cw(c2742.5,3590.85) 2742.5,3599.25 cw(c2742.5,3607.65) U1.13@2736.56,3601.71 ; v2@2793.6,3593.6 ccw(c2779.94,3579.94) 2779.94,3599.25 ccw(c2779.94,3618.57) v2@2793.6,3604.91 ; J1.3@3049.2,4890 ccw(c2986.43,4890) 3030.81,4934.38 ccw(c3075.2,4978.77) J1.3@3075.2,4916 ; J1.3@3057.2,4890 ccw(c3013.74,4890) 3044.47,4920.73 ccw(c3075.2,4951.46) J1.3@3075.2,4908
  Bottom Layer w8: v2(2799.25,3599.25) 2835,3635 2835,4540 3075.2,4780.2 J1.3 ; v2@2799.25,3607.25 ccw(c2799.25,3626.57) 2812.91,3612.91 ccw(c2826.57,3599.25) v2@2807.25,3599.25 ; J1.3@3056.81,4871.62 cw(c3012.43,4827.23) 3075.2,4827.23 cw(c3137.97,4827.23) J1.3@3093.58,4871.62 ; J1.3@3062.47,4877.27 cw(c3031.74,4846.54) 3075.2,4846.54 cw(c3118.65,4846.54) J1.3@3087.92,4877.27
TPIN-: J1.6 R6.2 U1.12 | length 2261.6
  Top Layer w8: R6.2@2533.46,4884.32 cw(c2533.46,4846.45) 2560.24,4873.22 ; R6.2 2593.47,4840 2875.2,4840 J1.6 2800,4664.8 v2(2800,4465) ; R6.2@2547.18,4898.03 ccw(c2575.54,4898.03) 2555.49,4877.98 ; U1.12 2774.84,3624.84 v2(2800,3650) ; U1.12@2736.56,3622.38 cw(c2742.5,3616.44) 2742.5,3624.84 cw(c2742.5,3633.24) U1.12@2736.56,3627.3 ; v2@2792,3650 cw(c2772.69,3650) 2786.34,3636.34 cw(c2800,3622.69) v2@2800,3642 ; v2@2794.34,4470.66 ccw(c2780.69,4484.31) 2800,4484.31 ccw(c2819.31,4484.31) v2@2805.66,4470.66 ; J1.6@2925.2,4764 ccw(c2925.2,4701.23) 2880.81,4745.62 ccw(c2836.43,4790) 2899.2,4790 ccw(c2836.43,4790) 2880.81,4834.38 ccw(c2925.2,4878.77) J1.6@2925.2,4816 ; J1.6@2925.2,4772 ccw(c2925.2,4728.54) 2894.47,4759.27 ccw(c2863.74,4790) 2907.2,4790 ccw(c2863.74,4790) 2894.47,4820.73 ccw(c2925.2,4851.46) J1.6@2925.2,4808
  Bottom Layer w8: v2@2794.34,3655.66 ccw(c2780.69,3669.31) 2800,3669.31 ccw(c2819.31,3669.31) v2@2805.66,3655.66 ; v2@2794.34,4459.34 cw(c2780.69,4445.69) 2800,4445.69 cw(c2819.31,4445.69) v2@2805.66,4459.34 ; v2(2800,3650) v2(2800,4465)
TPOUT+: J1.1 R1.2 U1.17 | length 2315.6
  Top Layer w8: v2@2900,3652 cw(c2900,3632.69) 2913.66,3646.34 cw(c2927.31,3660) v2@2908,3660 ; v2(2900,3660) 2935.16,3624.84 U1.17 ; 2921.62,3638.38 ccw(c2945.91,3662.67) U1.17@2945.91,3628.32 ; 2935.27,3624.73 ccw(c2945.91,3635.36) U1.17@2945.91,3620.32 ; U1.17@2943.44,3622.38 ccw(c2937.5,3616.44) 2937.5,3624.84 ccw(c2937.5,3633.24) U1.17@2943.44,3627.3 ; J1.1 3396.54,4890 R1.2 ; J1.1@3187.92,4877.27 cw(c3218.65,4846.54) 3218.65,4890 cw(c3218.65,4933.46) J1.1@3187.92,4902.73 ; J1.1@3193.58,4871.62 cw(c3237.97,4827.23) 3237.97,4890 cw(c3237.97,4952.77) J1.1@3193.58,4908.38 ; 3479.76,4973.22 cw(c3506.54,4946.45) R1.2@3506.54,4984.31 ; 3484.51,4977.98 ccw(c3464.46,4998.03) R1.2@3492.82,4998.03
  Bottom Layer w8: v2@2894.34,3665.66 ccw(c2880.69,3679.31) 2900,3679.31 ccw(c2919.31,3679.31) v2@2905.66,3665.66 ; v2(2900,3660) 2900,4460 3175.2,4735.2 J1.1 ; J1.1@3156.81,4871.62 cw(c3112.43,4827.23) 3175.2,4827.23 cw(c3237.97,4827.23) J1.1@3193.58,4871.62 ; J1.1@3162.47,4877.27 cw(c3131.74,4846.54) 3175.2,4846.54 cw(c3218.65,4846.54) J1.1@3187.92,4877.27
TPOUT-: J1.2 R4.2 U1.16 | length 2196.1
  Top Layer w8: v2(2900,3615) 2915.75,3599.25 U1.16 ; U1.16@2943.44,3596.79 ccw(c2937.5,3590.85) 2937.5,3599.25 ccw(c2937.5,3607.65) U1.16@2943.44,3601.71 ; J1.2 R4.2 ; J1.2@3137.92,4777.27 cw(c3168.65,4746.54) 3168.65,4790 cw(c3168.65,4833.46) J1.2@3137.92,4802.73 ; J1.2@3143.58,4771.62 cw(c3187.97,4727.23) 3187.97,4790 cw(c3187.97,4852.77) J1.2@3143.58,4808.38 ; R4.2@3496.84,4780.3 ccw(c3473.42,4756.88) 3473.42,4790 ccw(c3473.42,4823.11) R4.2@3496.84,4799.7
  Bottom Layer w8: v2@2892,3615 ccw(c2872.69,3615) 2886.34,3628.66 ccw(c2900,3642.31) v2@2900,3623 ; v2(2900,3615) 2865,3650 2865,4529.8 J1.2 ; J1.2@3099.2,4790 cw(c3036.43,4790) 3080.81,4745.62 cw(c3125.2,4701.23) J1.2@3125.2,4764 ; J1.2@3107.2,4790 cw(c3063.74,4790) 3094.47,4759.27 cw(c3125.2,4728.54) J1.2@3125.2,4772
VBUS: P1.2
VCC3.3: C2.2 C6.2 C7.2 J1.4 P1.1 R1.1 R4.1 R8.2 R9.1 U1.15 U1.19 U1.20 U1.25 U1.28 | length 5333.5
  Top Layer w15: C7.2@2713.46,4107.82 cw(c2713.46,4078.4) 2734.27,4099.2 ; C7.2 2860,3973.47 2860,3906.34 ; C7.2@2723.68,4118.03 ccw(c2743.59,4118.03) C7.2@2729.51,4103.95 ; 2860.43,3829.57 U1.25 ; 2861.61,3701.61 U1.20 ; U1.15 2881.34,3573.66 2860,3595 2860,3906.34 ; U1.28 2860,3906.34 ; J1.4@3025.2,4767.5 cw(c3025.2,4713.18) 3063.61,4751.59 cw(c3102.02,4790) J1.4@3047.7,4790 ; J1.4 3110.2,4705 3488.47,4705 R4.1 ; 3552.66,4769.2 cw(c3573.47,4748.4) R4.1@3573.47,4777.81 ; R4.1@3557.42,4773.95 ccw(c3543.34,4788.03) R4.1@3563.25,4788.03
  Top Layer w18: P1.1@2085.48,4264.52 ccw(c2050.44,4299.56) 2100,4299.56 ccw(c2149.56,4299.56) P1.1@2114.52,4264.52 ; R9.1@2093.84,4571.87 cw(c2078.96,4556.99) 2100,4556.99 cw(c2121.04,4556.99) R9.1@2106.16,4571.87 ; P1.1 R9.1 ; R8.2@2353.84,4079.63 ccw(c2338.48,4094.99) 2360.2,4094.99 ; R8.2@2360.2,4073.66 2360.2,4125 v1(2435.2,4200) 2633.47,4200 C7.2 C6.2 ; 2360.2,4094.03 ccw(c2380.57,4094.03) R8.2@2366.16,4079.63 ; v1@2404.83,4200 cw(c2331.51,4200) 2383.35,4148.16 cw(c2435.2,4096.31) v1@2435.2,4169.63 ; v1@2456.67,4178.53 cw(c2508.52,4126.68) 2508.52,4200 cw(c2508.52,4273.32) v1@2456.67,4221.47 ; 2695.22,4138.24 ccw(c2713.46,4156.48) C7.2@2713.46,4130.69 ; C7.2@2699.98,4133.49 cw(c2688.46,4121.97) C7.2@2704.75,4121.97 ; C6.2@2707.3,4028.13 ccw(c2692.42,4043.01) 2713.46,4043.01 ccw(c2734.51,4043.01) C6.2@2719.63,4028.13 ; C7.2@2707.3,4111.87 cw(c2692.42,4096.99) 2713.46,4096.99 cw(c2734.51,4096.99) C7.2@2719.63,4111.87 ; R4.1@3567.3,4798.13 ccw(c3552.42,4813.01) 3573.46,4813.01 ccw(c3594.51,4813.01) R4.1@3579.63,4798.13 ; R1.1@3567.3,4991.87 cw(c3552.42,4976.99) 3573.47,4976.99 cw(c3594.51,4976.99) R1.1@3579.63,4991.87 ; R1.1@3567.3,5008.13 ccw(c3552.42,5023.01) 3573.47,5023.01 ccw(c3594.51,5023.01) R1.1@3579.63,5008.13 ; C2.2@3567.3,5171.87 cw(c3552.42,5156.99) 3573.46,5156.99 cw(c3594.51,5156.99) C2.2@3579.63,5171.87 ; R4.1 C2.2
  Bottom Layer w18: P1.1@2100,4229.47 cw(c2100,4179.91) 2135.04,4214.96 cw(c2170.09,4250) P1.1@2120.53,4250 ; P1.1 2150,4200 v1(2435.2,4200) J1.4 ; v1@2413.72,4178.53 ccw(c2361.88,4126.68) 2361.88,4200 ccw(c2361.88,4273.32) v1@2413.72,4221.47 ; v1@2435.2,4230.37 ccw(c2435.2,4303.69) 2487.04,4251.85 ccw(c2538.89,4200) v1@2465.57,4200 ; J1.4@3004.2,4790 cw(c2953.5,4790) 2989.35,4754.15 cw(c3025.2,4718.3) J1.4@3025.2,4769
pads on no net: J1.5 J1.7 U1.3 U1.5 Y1.

## Polygon pours and split planes (outlines as drawn)
GND on Top Layer "Bottom Layer-No Net" (solid, remove dead copper): 2000,5600 2000,3000 4000,3000 4000,5600
GND on Bottom Layer "Bottom Layer-No Net" (solid, remove dead copper): 2000,5600 2000,3000 4000,3000 4000,5600

## Keep-outs
Keep-Out Layer:
  lines w8: 2025,3025 3975,3025 3975,5575 2025,5575 2025,3025

## Other copper
Top Layer:
  rectangle net GND: 2935,3720 3030,3760
  rectangle net VCC3.3: 2935,3665 3030,3710

## Silkscreen, mask and mechanical layers (free items; w line width, h text height)
Top Overlay:
  text "3V3" at 2390,4265 h36
  text "GND" at 2480,4025 h36
  text "INT" at 2405,3735 h36
  text "CS" at 2515,3605 h36
  text "RST" at 2380,3560 h36
  text "MISO" at 3495,3550 h36
  text "MOSI" at 2290,3410 h36
  text "SCLK" at 3485,3290 h36
Bottom Overlay:
  text "TCPIP Module Version 1" at 3500,3275 h48
  text "By L.R." at 2830,3150 h48

## Text inside footprints (layer, text, board x,y; h text height)
P1: Top Overlay "20" at 2165,3220 h50; Top Overlay "19" at 2055,3220 h50; Top Overlay "1" at 2100,4335 h50; Top Overlay "2" at 2185,4335 h50
P2: Top Overlay "20" at 3865,3225 h50; Top Overlay "19" at 3755,3225 h50; Top Overlay "1" at 3790,4330 h50; Top Overlay "2" at 3885,4330 h50